# Altium PCB PCB1.PcbDoc
Units mil, origin at the board's own origin, x right, y up, seen from the top; angles counter-clockwise.
Board outline 6000 x 4000 mil, 2 copper layers (Top Layer, Bottom Layer), stack 61.756 mil thick; 19 components, 12 nets, 74 pads, 0 vias.
Unrouted connection lines stored in the file: 59.
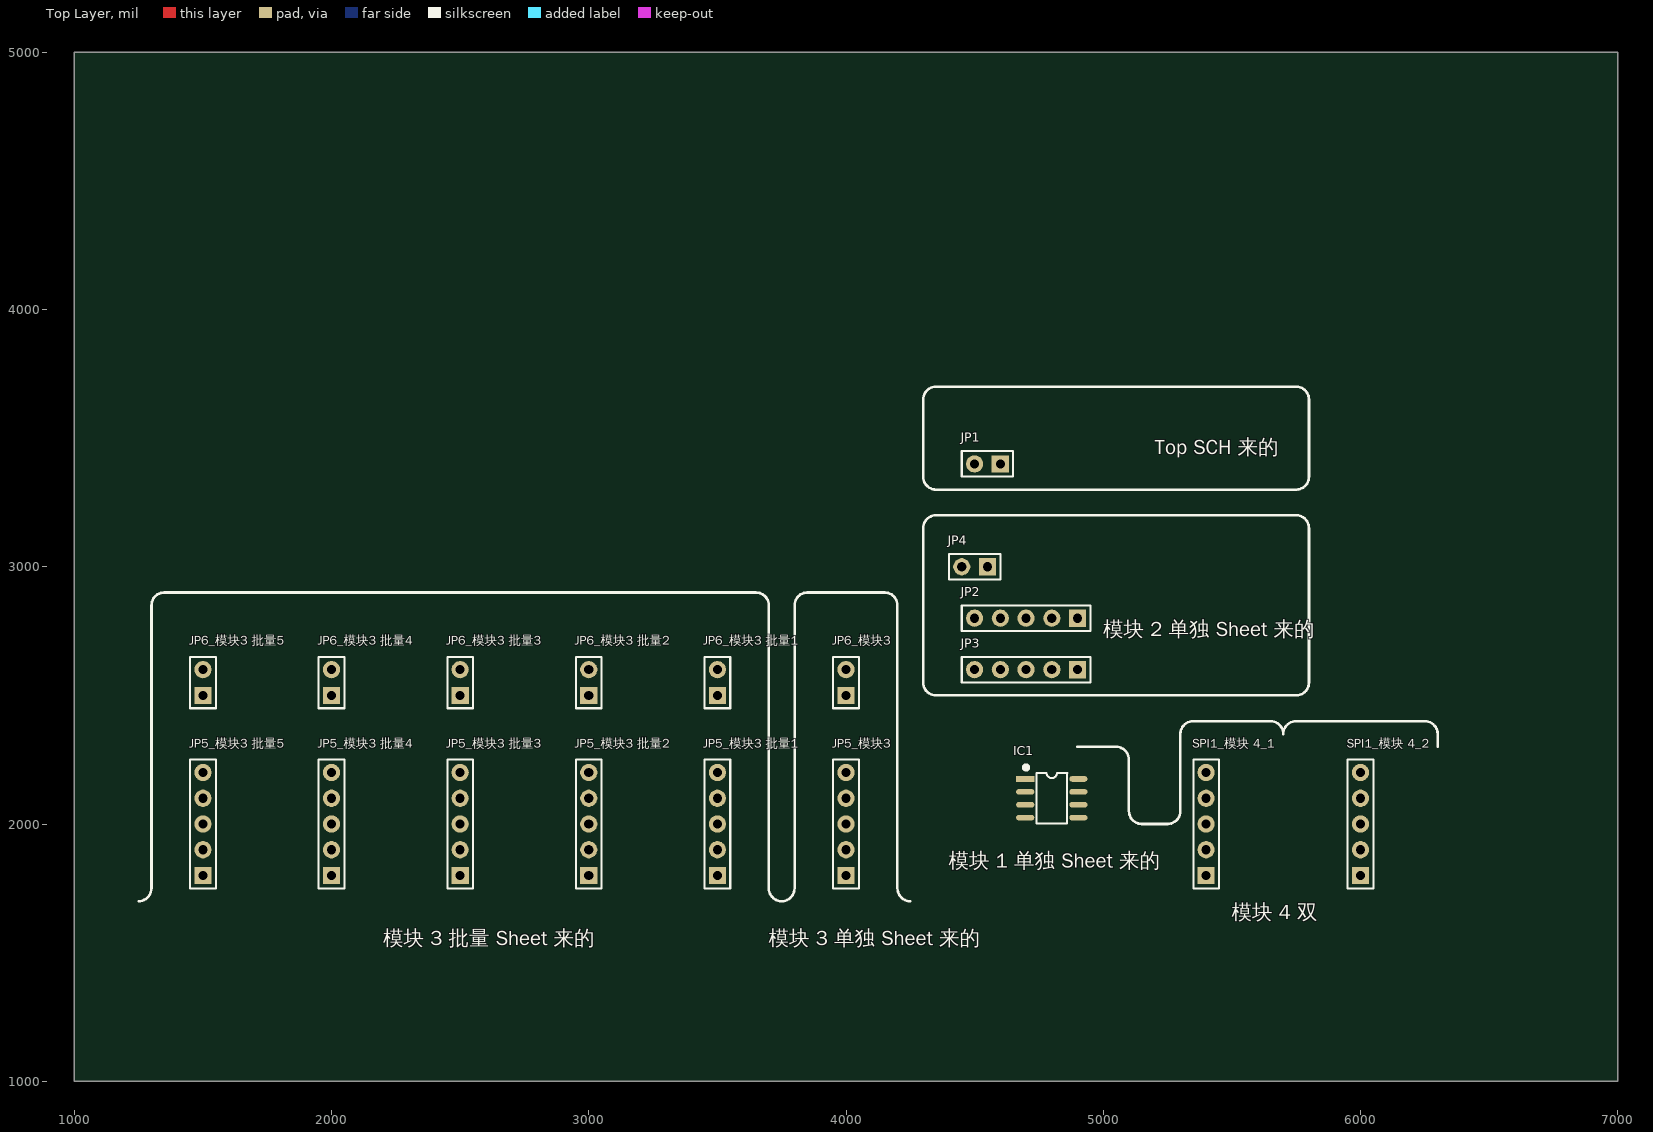
[diagram p0: Top Layer view]
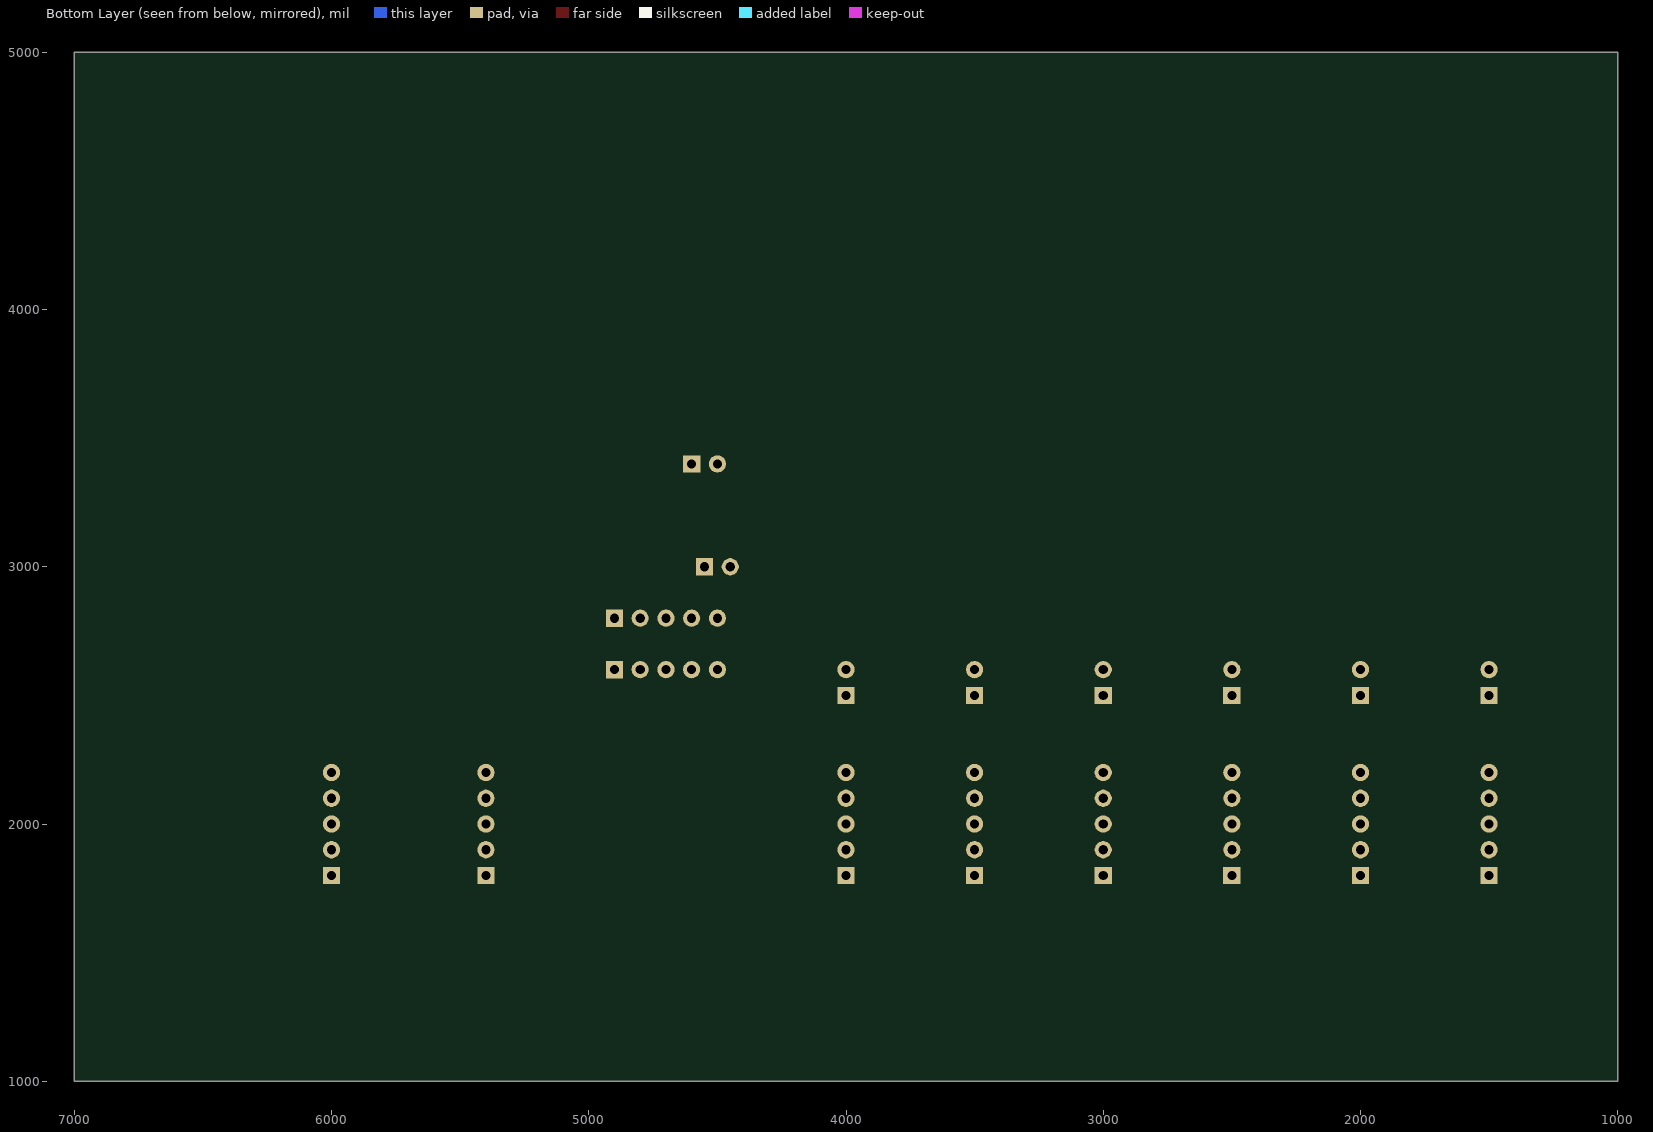
[diagram p1: Bottom Layer view, seen from below]

## Layer stack, top to bottom
Top Solder: solder mask 1, SM-001, Dk 4
Top Layer: signal copper 1.378
Dielectric 1: core 59, Core-043, Dk 4.3
Bottom Layer: signal copper 1.378
Bottom Solder: solder mask 1, SM-001, Dk 4

## Board outline
1000,1000 7000,1000 7000,5000 1000,5000

## Design rules (kind name [scope] priority, off if disabled: settings)
Clearance [All] p1: gap=6 ignorepadtopadclearanceinfootprint=TRUE except(0: Arc-Hole Track-Hole SMDPad-Hole THPad-Hole Via-Hole Fill-Hole Poly-Hole Region-Hole Text-Hole)
ComponentClearance [All] p1 off: gap=0 collisioncheckmode=3 verticalgap=0 showdistances=FALSE
Height [All] p1 off: minheight=0 maxheight=1000 prefheight=500
HoleSize [All] p1: absolutevalues=TRUE maxlimit=100 minlimit=12 maxpercent=80.000 minpercent=20.000
HoleToHoleClearance [All] p1: gap=0 allowstackedmicrovias=TRUE
MinimumSolderMaskSliver [All] p1 off: minsoldermaskwidth=0
MinimumSolderMaskSliver SilkscreenOverComponentPads [All] p2 off: minsoldermaskwidth=0
PlaneClearance [All] p1: clearance=10
PlaneConnect [All] p1: planeconnectstyle=Direct reliefexpansion=20 reliefentries=4 reliefconductorwidth=10 reliefairgap=10
PolygonConnect [All] p1: connectstyle=Direct reliefconductorwidth=10 reliefentries=4 polygonreliefangle="90 Angle" airgapwidth=10
RoutingVias [All] p1: holewidth=20 width=26 viastyle="Through Hole" minholewidth=12 minwidth=18 maxholewidth=100 maxwidth=120
SilkToSilkClearance [All] p1 off: silktosilkclearance=0
SilkToSolderMaskClearance [IsPad] p1 off: minsilkscreentomaskgap=0 clearancetoexposedcopper=TRUE
SolderMaskExpansion [All] p1: expansion=0 istentingtop=FALSE
Width [All] p1: maxlimit=500 minlimit=6 preferedwidth=10
21 further rules are at their usual default settings.

## Classes and differential pairs
channel class Sheet4: "模块 4_1" "模块 4_2"
component class "模块 4_1": "SPI1_模块 4_1"
component class "模块 4_2": "SPI1_模块 4_2"
component class 模块1: IC1
component class "模块3 批量5": "JP5_模块3 批量5" "JP6_模块3 批量5"
component class "模块3 批量4": "JP5_模块3 批量4" "JP6_模块3 批量4"
component class "模块3 批量3": "JP5_模块3 批量3" "JP6_模块3 批量3"
component class "模块3 批量2": "JP5_模块3 批量2" "JP6_模块3 批量2"
component class "模块3 批量1": "JP5_模块3 批量1" "JP6_模块3 批量1"
component class 模块3: JP5_模块3 JP6_模块3
component class Top: JP1
channel class Sheet3: "IC2 模块" U_Sheet31
net class bus_net_[5..1]: bus_net_1 bus_net_2 bus_net_3 bus_net_4 bus_net_5
component class 模块2: JP2 JP3 JP4

## Components (designator, comment, footprint, x,y, rotation, side; value= is the part's Value field where it differs from the comment)
IC1 "IC" SOP8_N 4800,2100 r0 top
JP1 "HDR-1X2" HDR2.54-LI-2P 4550,3400 r180 top
JP2 "HDR-1X5" HDR2.54-LI-5P 4700,2800 r180 top
JP3 "HDR-1X5" HDR2.54-LI-5P 4700,2600 r180 top
JP4 "HDR-1X2" HDR2.54-LI-2P 4500,3000 r180 top
JP5_模块3 "HDR-1X5" HDR2.54-LI-5P 4000,2000 r90 top (schematic designator JP5)
"JP5_模块3 批量1" "HDR-1X5" HDR2.54-LI-5P 3500,2000 r90 top (schematic designator JP5)
"JP5_模块3 批量2" "HDR-1X5" HDR2.54-LI-5P 3000,2000 r90 top (schematic designator JP5)
"JP5_模块3 批量3" "HDR-1X5" HDR2.54-LI-5P 2500,2000 r90 top (schematic designator JP5)
"JP5_模块3 批量4" "HDR-1X5" HDR2.54-LI-5P 2000,2000 r90 top (schematic designator JP5)
"JP5_模块3 批量5" "HDR-1X5" HDR2.54-LI-5P 1500,2000 r90 top (schematic designator JP5)
JP6_模块3 "HDR-1X2" HDR2.54-LI-2P 4000,2550 r90 top (schematic designator JP6)
"JP6_模块3 批量1" "HDR-1X2" HDR2.54-LI-2P 3500,2550 r90 top (schematic designator JP6)
"JP6_模块3 批量2" "HDR-1X2" HDR2.54-LI-2P 3000,2550 r90 top (schematic designator JP6)
"JP6_模块3 批量3" "HDR-1X2" HDR2.54-LI-2P 2500,2550 r90 top (schematic designator JP6)
"JP6_模块3 批量4" "HDR-1X2" HDR2.54-LI-2P 2000,2550 r90 top (schematic designator JP6)
"JP6_模块3 批量5" "HDR-1X2" HDR2.54-LI-2P 1500,2550 r90 top (schematic designator JP6)
"SPI1_模块 4_1" "HDR-1X5" HDR2.54-LI-5P 5400,2000 r90 top (schematic designator SPI1)
"SPI1_模块 4_2" "HDR-1X5" HDR2.54-LI-5P 6000,2000 r90 top (schematic designator SPI1)

## Footprints (in the part's own frame and the unit in brackets; to place one, negate y for a bottom-side part, rotate by r counter-clockwise, add the part's x,y. Pads: shape width x height; smd on the part's side, far side on the other; paste and mask are expansions set on the pad)
HDR2.54-LI-2P [mm] "排针，2脚"
  rect 1.7x1.7 hole 0.9: 1(-1.27,0)
  round 1.7 hole 0.9: 2(1.27,0)
  silkscreen extent -2.54,-1.27 2.54,1.27, body extent -2.54,-1.27 2.54,1.27, height 8.5
HDR2.54-LI-5P [mm] "排针，5脚"
  rect 1.7x1.7 hole 0.9: 1(-5.08,0)
  round 1.7 hole 0.9: 2(-2.54,0) 3(0,0) 4(2.54,0) 5(5.08,0)
  silkscreen extent -6.35,-1.27 6.35,1.27, body extent -6.35,-1.27 6.35,1.27, height 8.5
SOP8_N [mm] "5*6*1.8mm（长宽高）"
  rect 1.8x0.55 smd: 1(-2.625,1.905)
  oval 1.8x0.55 smd: 2(-2.625,0.635) 3(-2.625,-0.635) 4(-2.625,-1.905) 5(2.625,-1.905) 6(2.625,-0.635) 7(2.625,0.635) 8(2.625,1.905)
  silkscreen extent -2.69,-2.5 1.52,3.2, body extent -3,-2.5 3,2.5, height 1.9

## Part data
IC1: library part 8
JP1 JP4 JP6_模块3 "JP6_模块3 批量1" "JP6_模块3 批量2" "JP6_模块3 批量3" "JP6_模块3 批量4" "JP6_模块3 批量5": library part "Header 2", "2P接插件", BOM名称=2P接插件, 学习资源=www.ooocke.com, 版权归属=源创客
JP2 JP3 JP5_模块3 "JP5_模块3 批量1" "JP5_模块3 批量2" "JP5_模块3 批量3" "JP5_模块3 批量4" "JP5_模块3 批量5" "SPI1_模块 4_1" "SPI1_模块 4_2": library part "Header 5", "5P接插件", BOM名称=5P接插件, 学习资源=www.ooocke.com, 版权归属=源创客

## Nets (pads, with @x,y where several pads share a name; then routed paths per layer and width w, separated by ;. In a path a pad name is that pad's centre, name@x,y a point inside that pad or via, vN(x,y) a via of type N, cw(c..) or ccw(c..) an arc to the next point about the centre after c; other vN are vias at no path point)
bus_net_1: "JP5_模块3 批量1.5" "JP5_模块3 批量2.5" "JP5_模块3 批量3.5" "JP5_模块3 批量4.5" "JP5_模块3 批量5.5" JP2.5 JP3.5 JP5_模块3.5
bus_net_2: "JP5_模块3 批量1.4" "JP5_模块3 批量2.4" "JP5_模块3 批量3.4" "JP5_模块3 批量4.4" "JP5_模块3 批量5.4" JP2.4 JP3.4 JP5_模块3.4
bus_net_3: "JP5_模块3 批量1.3" "JP5_模块3 批量2.3" "JP5_模块3 批量3.3" "JP5_模块3 批量4.3" "JP5_模块3 批量5.3" JP2.3 JP3.3 JP5_模块3.3
bus_net_4: "JP5_模块3 批量1.2" "JP5_模块3 批量2.2" "JP5_模块3 批量3.2" "JP5_模块3 批量4.2" "JP5_模块3 批量5.2" JP2.2 JP3.2 JP5_模块3.2
bus_net_5: "JP5_模块3 批量1.1" "JP5_模块3 批量2.1" "JP5_模块3 批量3.1" "JP5_模块3 批量4.1" "JP5_模块3 批量5.1" JP2.1 JP3.1 JP5_模块3.1
IC1_GND: "JP6_模块3 批量1.1" "JP6_模块3 批量2.1" "JP6_模块3 批量3.1" "JP6_模块3 批量4.1" "JP6_模块3 批量5.1" JP1.1 JP4.1 JP6_模块3.1
IC1_Vcc_3.3V: "JP6_模块3 批量1.2" "JP6_模块3 批量2.2" "JP6_模块3 批量3.2" "JP6_模块3 批量4.2" "JP6_模块3 批量5.2" JP1.2 JP4.2 JP6_模块3.2
"SPI.CLK_模块 4_1": "SPI1_模块 4_1.2" "SPI1_模块 4_2.2" IC1.5
"SPI.CS_模块 4_1": "SPI1_模块 4_1.5" "SPI1_模块 4_2.5" IC1.8
"SPI.GND_模块 4_1": "SPI1_模块 4_1.1" "SPI1_模块 4_2.1" IC1.4
"SPI.MISO_模块 4_1": "SPI1_模块 4_1.3" "SPI1_模块 4_2.3" IC1.6
"SPI.MOSI_模块 4_1": "SPI1_模块 4_1.4" "SPI1_模块 4_2.4" IC1.7
pads on no net: IC1.1 IC1.2 IC1.3

## Silkscreen, mask and mechanical layers (free items; w line width, h text height)
Top Overlay:
  lines w10: 1250,1700 ccw(c1250,1750) 1300,1750 1300,2850 cw(c1350,2850) 1350,2900 3650,2900 cw(c3650,2850) 3700,2850 3700,1750 ccw(c3750,1750) 3750,1700 ccw(c3750,1750) 3800,1750 3800,2800 3800,2850 cw(c3850,2850) 3850,2900 4150,2900 cw(c4150,2850) 4200,2850 4200,1750 ccw(c4250,1750) 4250,1700 ; 4900,2300 5050,2300 cw(c5050,2250) 5100,2250 5100,2050 ccw(c5150,2050) 5150,2000 5250,2000 ccw(c5250,2050) 5300,2050 5300,2350 cw(c5350,2350) 5350,2400 5600,2400 5650,2400 cw(c5650,2350) 5700,2350 cw(c5750,2350) 5750,2400 6150,2400 6250,2400 cw(c6250,2350) 6300,2350 6300,2300 ; 4300,2550 ccw(c4350,2550) 4350,2500 5750,2500 ccw(c5750,2550) 5800,2550 5800,3150 ccw(c5750,3150) 5750,3200 4350,3200 ccw(c4350,3150) 4300,3150 4300,3100 4300,2550 ; 4300,3350 ccw(c4350,3350) 4350,3300 5750,3300 ccw(c5750,3350) 5800,3350 5800,3650 ccw(c5750,3650) 5750,3700 4350,3700 ccw(c4350,3650) 4300,3650 4300,3350
  text "Top SCH 来的" at 5200,3418.78 h100
  text "模块 2 单独 Sheet 来的" at 5000.09,2710.08 h100
  text "模块 1 单独 Sheet 来的" at 4400.09,1810.08 h100
  text "模块 4 双" at 5500.09,1610.17 h100
  text "模块 3 批量 Sheet 来的" at 2200.09,1510.08 h100
  text "模块 3 单独 Sheet 来的" at 3700.09,1510.08 h100